# Altium PCB touch-24.PcbDoc
Units mm, origin at the board's own origin, x right, y up, seen from the top; angles counter-clockwise.
Board outline 151 x 86.38 mm, 2 copper layers (Top Layer, Bottom Layer); 53 components, 43 nets, 145 pads, 23 vias.
Unrouted connection lines stored in the file: 2.
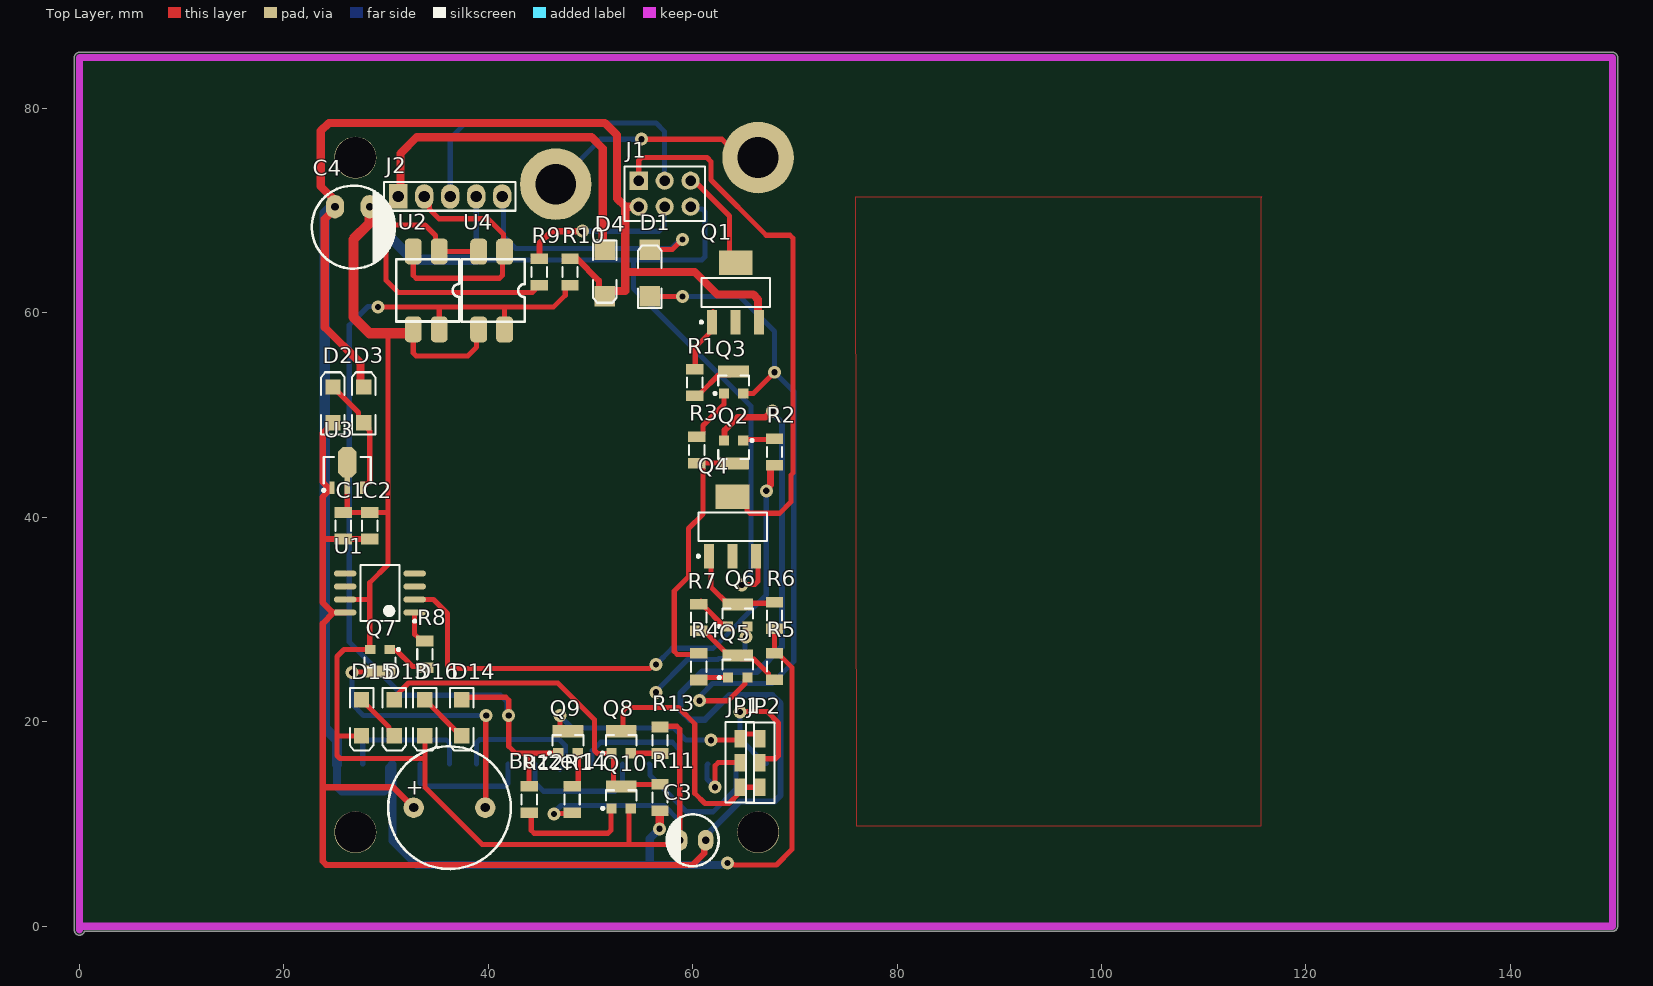
[diagram p0: Top Layer view]
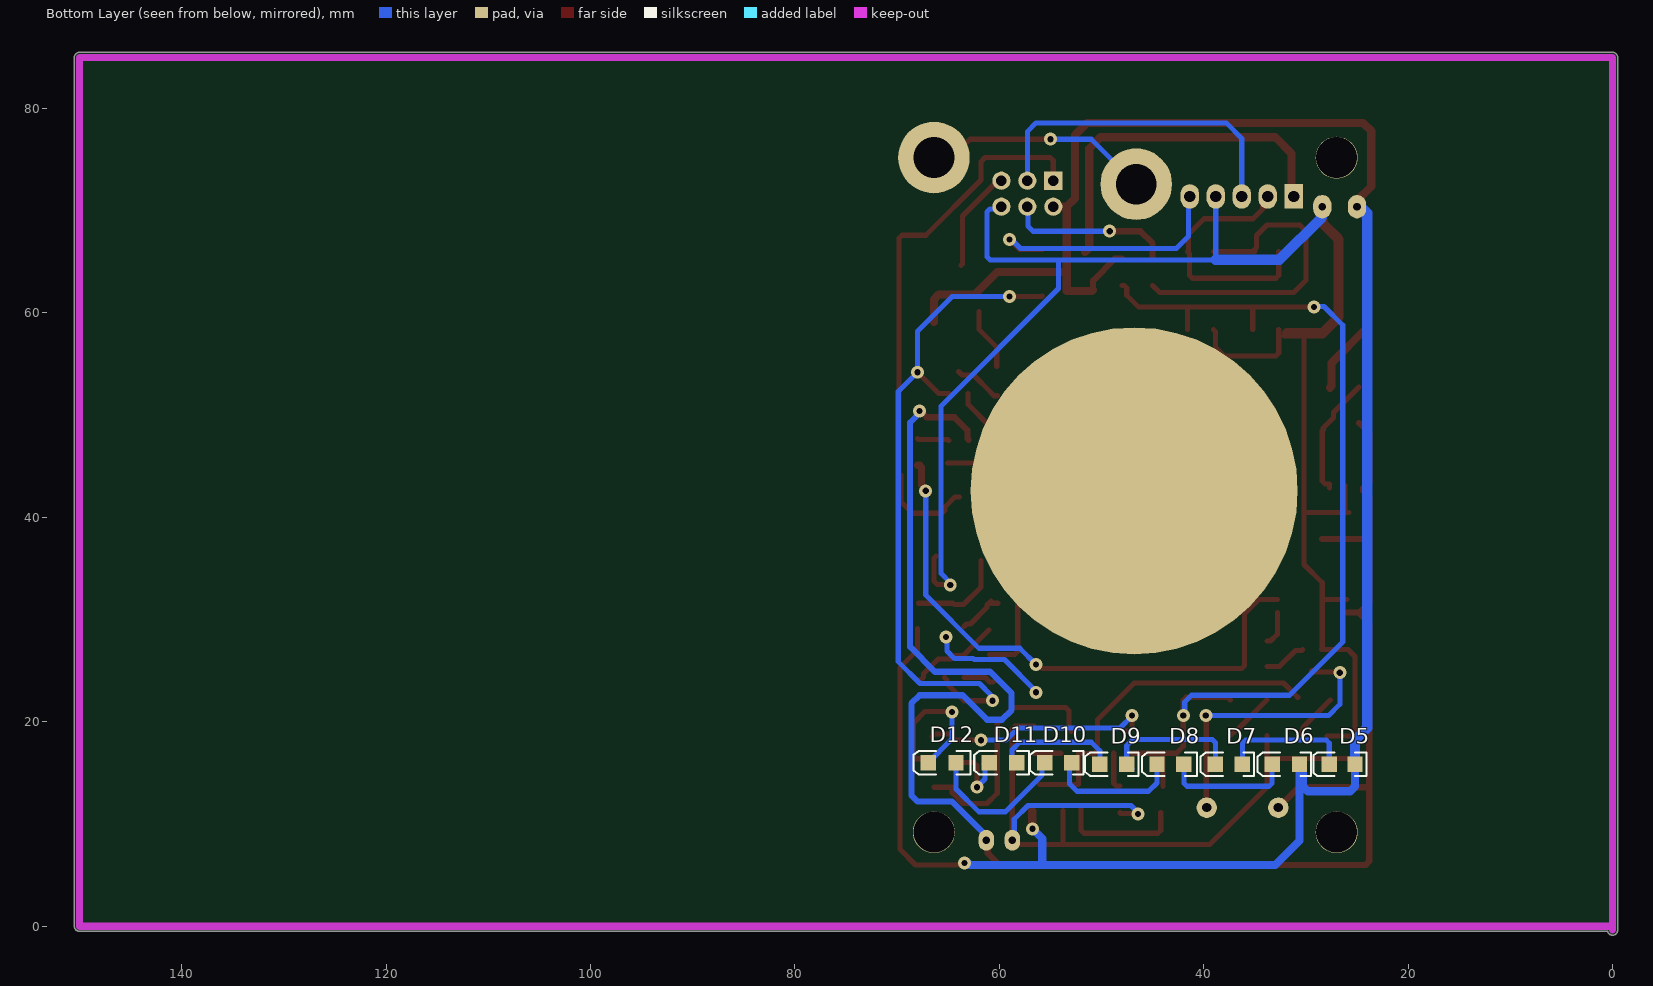
[diagram p1: Bottom Layer view, seen from below]

## Layer stack, top to bottom
Top Solder: solder mask 0.0102, Solder Resist, Dk 3.5
Top Layer: signal copper 0.0356
Dielectric 1: dielectric 0.32, FR-4, Dk 4.8
Bottom Layer: signal copper 0.0356
Bottom Solder: solder mask 0.0102, Solder Resist, Dk 3.5

## Board outline
-0.5,-0.381 -0.5,85 cw(c0,85) 0,85.5 150,85.5 cw(c150,85) 150.5,85 150.5,0 cw(c150,0) 150,-0.5 0.486,-0.5 cw(c0,-0.381)

## Design rules (kind name [scope] priority, off if disabled: settings)
Clearance Clearance_1 [InPolygon] p1: gap=1 ignorepadtopadclearanceinfootprint=FALSE
Clearance [All] p2: gap=0.6 ignorepadtopadclearanceinfootprint=FALSE
PolygonConnect [All] p1: connectstyle=Relief reliefconductorwidth=0.254 reliefentries=4 polygonreliefangle="90 Angle" airgapwidth=0.254
RoomDefinition touch-24 [InComponentClass('touch-24')] p1: confinementstyle=ConfineIn formatcopy=TRUE lockcomponents=FALSE outline 144.907,-4.953 247.904,-4.953 247.904,23.114 144.907,23.114
RoutingLayers [All] p1: top layer_v5=FALSE bottom layer_v5=TRUE
RoutingVias [All] p1: holewidth=0.711 width=2.5 viastyle="Through Hole" minholewidth=0.711 minwidth=1.27 maxholewidth=0.711 maxwidth=2
SolderMaskExpansion [All] p1: expansion=0.102 istentingtop=FALSE
Width [All] p1: maxlimit=3 minlimit=0.5 preferedwidth=1
29 further rules are at their usual default settings.

## Components (designator, comment, footprint, x,y, rotation, side; value= is the part's Value field where it differs from the comment)
Buzzer1 "Buzzer" BUZZER 36.2,11.6 r0 top
C1 "=Value" "CAP 1206" 25.8,39.2 r270 top
C2 "=Value" "CAP 1206" 28.4,39.2 r270 top
C3 "=Value" ELEC-CAP-RAD10-20 60,8.4 r0 top
C4 "=Value" ELEC-CAP-RAD15-30 26.8,68.4 r180 top
D1 "D Tunnel1" 3.2X1.6X1.1#1 55.8,63.4 r90 top
D2 "D Tunnel1" 3.2X1.6X1.1#2 24.8,51 r90 top
D3 "D Tunnel1" 3.2X1.6X1.1#2 27.8,51 r90 top
D4 "D Tunnel1" 3.2X1.6X1.1#3 51.4,64.2 r270 top
D5 "LED2" 3.2X1.6X1.1#4 26.198,15.853 r0 bottom
D6 "LED2" 3.2X1.6X1.1#5 31.525,15.853 r0 bottom
D7 "LED2" 3.2X1.6X1.1#6 37.113,15.853 r0 bottom
D8 "LED2" 3.2X1.6X1.1#6 42.828,15.853 r0 bottom
D9 "LED2" 3.2X1.6X1.1#6 48.416,15.853 r0 bottom
D10 "LED2" 3.2X1.6X1.1#6 53.8,16 r0 bottom
D11 "LED2" 3.2X1.6X1.1#7 59.25,16 r0 bottom
D12 "LED2" 3.2X1.6X1.1#7 65.2,16 r0 bottom
D13 "D Tunnel1" 3.2X1.6X1.1#2 30.8,20.4 r270 top
D14 "D Tunnel1" 3.2X1.6X1.1#2 37.4,20.4 r270 top
D15 "D Tunnel1" 3.2X1.6X1.1#2 27.6,20.4 r270 top
D16 "D Tunnel1" 3.2X1.6X1.1#2 33.8,20.4 r270 top
J1 "Header3X2" "HEADER 3X2" 54.72,72.94 r0 top
J2 "Header5X1" "HEADER 5X1" 31.2,71.4 r0 top
JP1 "Jumper Selector" "Jumper Selector"#1 64.6,13.52 r90 top
JP2 "Jumper Selector" "Jumper Selector"#2 66.6,13.46 r90 top
Q1 "MOSFET-P4" SOT223_N 64.2,62 r90 top
Q2 "PNP" SOT-23B_N 64,46.4 r270 top
Q3 "QNPN" SOT-23B_L#1 64,53.2 r90 top
Q4 "MOSFET-P4" SOT223_N 63.9,39.1 r90 top
Q5 "QNPN" SOT-23B_L#1 64.4,25.4 r90 top
Q6 "QNPN" SOT-23B_L#1 64.4,30.4 r90 top
Q7 "QNPN" SOT-23B_L#2 29.4,26 r270 top
Q8 "QNPN" SOT-23B_L#1 53,18 r90 top
Q9 "QNPN" SOT-23B_L#1 47.8,18 r90 top
Q10 "QNPN" SOT-23B_L#1 53,12.6 r90 top
R1 "10K" "RES 1206 (3216X08L)" 60.2,53.2 r90 top
R2 "10K" "RES 1206 (3216X08L)" 68,46.4 r90 top
R3 "10K" "RES 1206 (3216X08L)" 60.4,46.6 r90 top
R4 "10K" "RES 1206 (3216X08L)" 60.6,25.4 r270 top
R5 "10K" "RES 1206 (3216X08L)" 68,25.4 r90 top
R6 "10K" "RES 1206 (3216X08L)" 68,30.4 r90 top
R7 "10K" "RES 1206 (3216X08L)" 60.6,30.2 r90 top
R8 "10K" "RES 1206 (3216X08L)" 33.8,26.6 r270 top
R9 "10K" "RES 1206 (3216X08L)" 45,64 r270 top
R10 "10K" "RES 1206 (3216X08L)" 48,64 r90 top
R11 "10K" "RES 1206 (3216X08L)" 56.8,12.6 r270 top
R12 "10K" "RES 1206 (3216X08L)" 44,12.4 r270 top
R13 "10K" "RES 1206 (3216X08L)" 56.8,18.2 r270 top
R14 "10K" "RES 1206 (3216X08L)" 48.2,12.4 r90 top
U1 "ATtiny15L-1SC" 8S2_N 29.4,32.6 r180 top
U2 "PC817" DIP4 35.2,66.02 r270 top
U3 "LM1117MP-3.3" SOT89L 26.2,44.6 r90 top
U4 "PC817" DIP4 41.6,66 r270 top

## Footprints (in the part's own frame and the unit in brackets; to place one, negate y for a bottom-side part, rotate by r counter-clockwise, add the part's x,y. Pads: shape width x height; smd on the part's side, far side on the other; paste and mask are expansions set on the pad)
3.2X1.6X1.1#1 [mm] "SMT LED; 2 Flat Leads"
  rect 2x2 smd: 1(-1.75,0) 2(2.8,0)
  silkscreen extent -2.9,-1.15 3.2,1.15
3.2X1.6X1.1#2 [mm] "SMT LED; 2 Flat Leads"
  rect 1.5x1.5 smd: 1(-1.75,0) 2(1.75,0)
  silkscreen extent -2.9,-1.15 3.2,1.15
3.2X1.6X1.1#3 [mm] "SMT LED; 2 Flat Leads"
  rect 2x2 smd: 1(-2,0) 2(2.55,0)
  silkscreen extent -2.9,-1.15 3.2,1.15
3.2X1.6X1.1#4 [mm] "SMT LED; 2 Flat Leads"
  rect 1.5x1.5 smd: 1(-0.998,0) 2(1.524,0)
  silkscreen extent -2.14,-1.15 3.05,1.15
3.2X1.6X1.1#5 [mm] "SMT LED; 2 Flat Leads"
  rect 1.5x1.5 smd: 1(-0.889,0) 2(1.778,0)
  silkscreen extent -2.03,-1.15 3.2,1.15
3.2X1.6X1.1#6 [mm] "SMT LED; 2 Flat Leads"
  rect 1.5x1.5 smd: 1(-0.889,0) 2(1.75,0)
  silkscreen extent -2.03,-1.15 3.2,1.15
3.2X1.6X1.1#7 [mm] "SMT LED; 2 Flat Leads"
  rect 1.5x1.5 smd: 1(-0.97,0) 2(1.75,0)
  silkscreen extent -2.16,-1.15 3.2,1.15
8S2_N [mm] "SOP, 8-Leads, Body 5.3x5.3mm, Pitch 1.27mm, IPC Medium Density"
  oval 2.2x0.6 smd: 1(-3.4,1.905) 2(-3.4,0.635) 3(-3.4,-0.635) 4(-3.4,-1.905) 5(3.4,-1.905) 6(3.4,-0.635) 7(3.4,0.635) 8(3.4,1.905)
  silkscreen extent -3.52,-2.75 1.9,2.88, body extent -2.73,-2.75 2.73,2.75, height 2.16
BUZZER [mm] "BUZZER"
  round 2 hole 0.9: 1(-3.5,0) 2(3.5,0)
  silkscreen extent -6,-6 6,6
"CAP 1206" [mm]
  rect 1.05x1.7 smd: 1(-1.27,0) 2(1.326,0)
  silkscreen extent -0.47,-0.75 0.53,0.75, body extent -1.49,-0.77 1.55,0.75, height 0.75
DIP4 [mil]
  rrect50% 100x65 smd: 1(0,0) 2(0,-100) 3(300,-100) 4(300,0)
  silkscreen extent 30,-165 270,77, body extent -5,-140 305,40, height 169
ELEC-CAP-RAD10-20 [mil]
  oval 60x80 hole 30: 1(-50,0) 2(50,0)
  silkscreen extent -100,-100 100,100, body extent -124,-124 124,124, height 404
ELEC-CAP-RAD15-30 [mil]
  oval 70x90 hole 30: 1(-62.99,-78.74) 2(70.87,-78.74)
  silkscreen extent -160,-160 160,160, body extent -167,-167 167,167, height 609
"HEADER 3X2" [mil]
  rect 70x70 hole 40: 1(0,0)
  round 70 hole 40: 2(0,-100) 3(100,0) 4(100,-100) 5(200,0) 6(200,-100)
  silkscreen extent -55,-155 255,55, body extent -51,-150 249,50, height 330
"HEADER 5X1" [mm]
  rect 1.8x2.4 hole 1.1: 1(0,0)
  oval 1.8x2.4 hole 1.1: 2(2.54,0) 3(5.08,0) 4(7.62,0) 5(10.16,0)
  silkscreen extent -1.4,-1.4 11.46,1.4, body extent -1.22,-1.19 11.48,1.35, height 8.38
"Jumper Selector"#1 [mm]
  rect 1.7x1 smd: 1(2.48,0) 2(0.08,0) 3(4.83,0)
  silkscreen extent -1.4,-1.4 6.48,1.4, body extent -1.24,-1.27 6.38,1.27, height 10.16
"Jumper Selector"#2 [mm]
  rect 1.7x1 smd: 1(2.54,0) 2(0.14,0) 3(4.89,0)
  silkscreen extent -1.4,-1.4 6.48,1.4, body extent -1.24,-1.27 6.38,1.27, height 10.16
"RES 1206 (3216X08L)" [mm] "Chip Resistor, 2-Leads, Body 3.2x1.6mm, IPC High Density _ (0.125 W)"
  rect 1.05x1.7 smd: 1(-1.295,0) 2(1.301,0)
  silkscreen extent -0.5,-0.75 0.5,0.75, body extent -1.52,-0.76 1.53,0.76, height 0.6
SOT89L [mm] "SOT89, 3-Leads, Body 4.5x2.4 mm, Pitch 1.5mm, Lead Span 4.1mm, IPC High Density"
  rect 1.2x0.5 smd: 1(-1.7,1.5) 3(-1.7,-1.5)
  rect 1.6x0.5 smd: 2(-1.5,0)
  oct 3x1.8 smd: 2(0.8,0)
  silkscreen extent -2.07,-2.3 1.3,2.42, body extent -1.3,-2.3 1.3,2.3, height 1.6
SOT223_N [mm] "SOT223, 4-Leads, Body 6.5x3.5mm, Pitch 2.3mm, Lead Span 7mm, IPC Medium Density"
  rect 2.4x1 smd: 1(-2.9,2.3) 2(-2.9,0) 3(-2.9,-2.3)
  rect 2.4x3.3 smd: 4(2.9,0)
  silkscreen extent -3.02,-3.35 1.4,3.47, body extent -1.85,-3.35 1.85,3.35, height 1.7
SOT-23B_L#1 [mm] "SOT23, 3-Leads, Body 2.9x1.3mm, Pitch 0.95mm, Lead Span 2.4mm, IPC High Density"
  rect 1x1 smd: 1(-1.075,0.95) 2(-1.075,-0.95)
  rect 1.2x3 smd: 3(1.075,0)
  silkscreen extent -1.2,-1.5 0.7,1.92, body extent -0.7,-1.5 0.7,1.5, height 1.14
SOT-23B_L#2 [mm] "SOT23, 3-Leads, Body 2.9x1.3mm, Pitch 0.95mm, Lead Span 2.4mm, IPC High Density"
  rect 0.85x1 smd: 1(-1.075,0.95) 2(-1.075,-0.95)
  rect 1.2x3 smd: 3(1.075,0)
  silkscreen extent -1.2,-1.5 0.7,1.93, body extent -0.7,-1.5 0.7,1.5, height 1.14
SOT-23B_N [mm] "SOT23, 3-Leads, Body 2.9x1.3mm, Pitch 0.95mm, Lead Span 2.4mm, IPC Medium Density"
  rect 1x1 smd: 1(-1.125,0.95) 2(-1.125,-0.95)
  rect 1.2x3 smd: 3(1.125,0)
  silkscreen extent -1.25,-1.5 0.7,1.93, body extent -0.7,-1.5 0.7,1.5, height 1.14

## Part data
C1 C2: library part Capacitor, "Capacitor"
C3 C4: library part "Capacitor Electrolytic", "Electrolytic Capacitor"
D1 D2 D3 D4 D13 D14 D15 D16: "Tunnel Diode - RLC Model", LatestRevisionDate=17-Jul-2002, LatestRevisionNote="Re-released for DXP Platform.", PackageDescription="SM LED; 2 Flat Leads", PackageReference=3.2X1.6X1.1, PackageVersion=Feb-2002, Published=8-Jun-2000, Publisher="Altium Limited"
D5 D6 D7 D8 D9 D10 D11 D12: "Typical RED, GREEN, YELLOW, AMBER GaAs LED", LatestRevisionDate=17-Jul-2002, LatestRevisionNote="Re-released for DXP Platform.", PackageDescription="SM LED; 2 Flat Leads", PackageReference=3.2X1.6X1.1, PackageVersion=Feb-2002, Published=8-Jun-2000, Publisher="Altium Limited"
Q1 Q4: "P-Channel MOSFET, Externally Terminated Substrate", Code_IPC=SOT223-4, Code_JEDEC=TO-261-AA-B, Code_JEITA=SC-75, LatestRevisionDate=29-May-2009, LatestRevisionNote="IPC-7351 Footprint Added.", PackageDescription="4-Pin SOT-223 Package 2.3 mm Pitch, 7 mm Lead Span", PackageReference=SOT223, PackageVersion=2002, Published=24-Mar-1999, Publisher="Altium Limited"
Q2: "PNP Bipolar Transistor", LatestRevisionDate=29-May-2009, LatestRevisionNote="IPC-7351 Footprint Added.", PackageDescription="3-Pin SOT-23 Package 0.95 mm Pitch, 2.4 mm Lead Span", PackageReference=SOT-23B, PackageVersion=Aug-1999, Published=8-Jun-2000, Publisher="Altium Limited"
Q3 Q5 Q6 Q7 Q8 Q9 Q10: "NPN Bipolar Transistor", LatestRevisionDate=29-May-2009, LatestRevisionNote="IPC-7351 Footprint Added.", PackageDescription="3-Pin SOT-23 Package 0.95 mm Pitch, 2.4 mm Lead Span", PackageReference=SOT-23B, PackageVersion=Aug-1999, Published=8-Jun-2000, Publisher="Altium Limited"
R1 R2 R3 R4 R5 R6 R7 R8 R9 R10 R11 R12 R13 R14: library part Resistor, "Resistor", Power="1/4 W", Tolerance=5%
U1: "8-Bit AVR Microcontroller with 1K Byte of Flash Memory", Supplier Part Number 1=ATTINY15L-1SC-ND, ComponentLink1Description=Datasheet, ComponentLink1URL=http://www.atmel.com/dyn/resources/prod_documents/doc1187.pdf, ComponentLink2Description="Atmel.com Home", ComponentLink2URL=http://www.atmel.com, DatasheetVersion=1187E-AVR-06/02, LatestRevisionDate=16-Oct-2006, LatestRevisionNote="IPC-7351 Footprint Added.", PackageDescription="8-Lead, 0.208\" Body, Plastic Small Outline Package (EIAJ)", PackageReference=8S2, PackageVersion="revF, Apr-2008", Published=17-Sep-2003, Publisher="Altium Limited", Supplier 1=Digi-Key, Supplier 2=Mouser, Supplier Part Number 2=556-ATTINY15L1SC
U2 U4: library part OPTCOUPLER_01, "4-Pin Phototransistor Optocoupler"
U3: "800mA Low-Dropout Linear Regulator", DigiKeyPartNumber=LM1117MP-3.3CT-ND, Manufacturer="National Semiconductor", PackageTopMarking=XYTT*N05A, PowerWise=N, Code_IPC=SOT223-4, Code_JEDEC=TO-261-AA, ComponentLink1Description="LM1117 Datasheet", ComponentLink1URL=http://www.national.com/ds/LM/LM1117.pdf, ComponentLink2Description="LM1117 Web Page", ComponentLink2URL=http://www.national.com/pf/LM/LM1117.html, ComponentLink3Description="MP04A Package Page", ComponentLink3URL=http://www.national.com/packaging/folders/mp04a.html, CompType="LDO IC", DatasheetVersion=Apr-2006, PackageDescription="Molded SOT-223, 6.50 x 3.56 x 1.6mm Body, 4 Lead, 2.3mm Pitch", PackageReference=MP04A, PackageVersion="revB, Apr-2003", PartNumber=LM1117MP-3.3, PinCount=4, Published=4-Dec-2008, Publisher="Altium Limited", RoHS=O
Buzzer1: ComponentLinkURL=www.picpars.com, Designer="Seyed Mohsen Ghasemain"

## Free pads (board coordinates)
  round 4.1 hole 4: 2(66.4,9.2) 3(27,9.2) 4(27,75.2)
  round 7 hole 4: 5(46.6,72.6) 5(66.4,75.2)
  round 32 smd far side: 6(46.8,42.6)

## Via types
v1: diameter 1.27, hole 0.6, Top Layer to Bottom Layer, 23 vias

## Nets (pads, with @x,y where several pads share a name; then routed paths per layer and width w, separated by ;. In a path a pad name is that pad's centre, name@x,y a point inside that pad or via, vN(x,y) a via of type N, cw(c..) or ccw(c..) an arc to the next point about the centre after c; other vN are vias at no path point)
ACS: D1.2 J2.5 | length 25.9
  Top Layer w0.5: D1.2 58,66.2 v1(59,67.2)
  Bottom Layer w0.5: J2.5 41.497,71.263 41.497,67.503 42.685,66.315 57.926,66.315 58.811,67.2 v1(59,67.2)
bizer: R8.1 U1.1 | length 3.4
  Top Layer w0.5: U1.1 32.8,28.57 33.475,27.895 R8.1
GND: C1.1 C2.1 C3.1 C4.1 D15.2 D16.2 J1.6 J2.4 Q4.3 Q6.2 Q7.2 Q10.2 R13.1 R14.1 U1.7 U2.3 U3.2 U4.3 | length 263.2
  Top Layer w0.5: C1.1 C1.1@26.2,40.47 ; U1.7 28.4,31.965 ; U3.2@26.2,43.1 C1.1@26.2,40.47 ; D15.2@27.941,18.6 25.2,18.6 ; C2.1@27.965,40.47 C1.1@26.2,40.47 ; C2.1@28,40.47 C2.1 30.2,40.47 ; Q7.2 Q7.2@28.4,27.075 ; U2.3@32.142,57.742 30.2,57.742 30.2,40.47 ; U2.3 32.66,56.093 32.953,55.8 38,55.8 38.863,56.663 38.863,58.183 U4.3 ; D16.2 33.8,16.4 ; v1(46.429,10.976) 46.493,11.04 48.136,11.04 R14.1 ; Q10.2@53.75,11.325 53.75,8 ; R13.1@56.6,19.561 58.437,19.561 58.73,19.269 C3.1 58.33,8 53.75,8 ; v1(64.8,33.4) 64.852,33.452 66.107,33.452 66.4,33.744 66.4,36 Q4.3 ; 25.2,18.6 25.2,16.693 25.493,16.4 33.8,16.4 ; 25.2,18.6 25.2,26.4 25.875,27.075 Q7.2@28.4,27.075 ; Q7.2@28.4,27.075 28.4,31.965 ; 28.4,31.965 28.4,33.6 30.2,35.4 30.2,40.47 ; 33.8,16.4 33.8,13.6 39.4,8 53.75,8
  Top Layer w1: C4.1@28.4,71 28.384,70.984 28.384,68.784 26.8,67.2 26.8,59.6 28.376,58.024 30.2,58.024 U2.3@31.86,58.024
  Bottom Layer w0.5: J2.4 38.82,65.2 54.2,65.2 ; v1(46.429,10.976) 46.429,11.122 47.107,11.8 57.2,11.8 58.534,10.466 58.534,8.596 C3.1 ; v1(56.4,22.885) 56.4,23 59.5,26.1 62.456,26.1 62.556,26.2 64.4,26.2 65.125,26.925 65.125,28.225 v1(65.21,28.31) ; J1.6@60.2,70.46 60.2,70.38 60.39,70.189 60.907,70.189 61.2,69.896 61.2,65.493 60.907,65.2 54.2,65.2 ; v1(64.8,33.4) 64.8,33.608 65.715,34.523 65.715,50.885 54.2,62.4 54.2,65.2
  Bottom Layer w1: C4.1@28.4,71 28.416,70.984 28.416,69.384 32.6,65.2 38.82,65.2
key: J1.3 J2.3 | length 32.4
  Bottom Layer w0.5: J2.3 36.28,77.08 37.8,78.6 56.4,78.6 57.26,77.74 J1.3
key+: J1.5 Q1.4 | length 9.7
  Top Layer w0.5: J1.5@60.177,72.9 63.6,69.477 63.6,64.8 Q1.4@63.737,64.663
key-: J1.1 Q4.4 | length 54.4
  Top Layer w0.5: J1.1 54.72,74.907 55.013,75.2 61.4,75.2 61.8,74.8 61.8,73 67.2,67.6 69.507,67.6 69.8,67.307 69.8,44.328 69.6,44.128 69.6,41.493 68.507,40.4 65.593,40.4 65.3,40.693 65.3,41.05 64.35,42 Q4.4
led: D14.1 Q9.1 R10.1 R12.1 U2.4 U4.4 | length 96.2
  Top Layer w0.5: v1(29.2,60.6) 29.201,60.599 35.2,60.599 ; U2.4 35.2,60.599 ; D14.1 37.65,22.4 41.707,22.4 42,22.107 v1(42,20.6) 42,17.6 42.675,16.925 44,16.925 ; U4.4 41.6,60.599 ; R12.1 44,16.925 ; Q9.1@47.03,16.925 44,16.925 ; R10.1 47.809,62.705 47.534,62.43 47.534,61.734 46.399,60.599 41.6,60.599 ; 35.2,60.599 41.6,60.599
  Bottom Layer w0.5: v1(29.2,60.6) 29.179,60.621 28.221,60.621 26.4,58.8 26.4,27.8 31.6,22.6 41.2,22.6 41.853,21.947 41.853,20.747 v1(42,20.6)
"led IN": J2.2 U2.2 U4.1 | length 25.1
  Top Layer w0.5: U2.2 32.66,63.693 32.953,63.4 41.107,63.4 41.4,63.693 41.4,65.8 U4.1 41.473,66.127 41.473,67.727 39.98,69.22 35.18,69.22 34.249,70.151 34.249,71.151 J2.2@34,71.4
NetBuzzer1_2: Buzzer1.2 Q7.3 | length 28.4
  Top Layer w0.5: v1(26.685,24.8) 26.747,24.863 29.35,24.863 29.45,24.963 Q7.3@29.45,25 ; Buzzer1.2@39.8,11.8 39.75,11.85 39.75,20.55 v1(39.8,20.6)
  Bottom Layer w0.5: v1(26.685,24.8) 26.685,21.715 27.8,20.6 v1(39.8,20.6)
NetD1_1: D1.1 Q3.2 Q5.2 | length 67.5
  Top Layer w0.5: D1.1 55.85,61.6 v1(59,61.6) ; v1(60.661,22.061) 63.461,22.061 65.1,23.7 65.1,24.075 Q5.2 ; Q3.2 65.925,52.125 v1(68,54.2)
  Bottom Layer w0.5: v1(59,61.6) 64.6,61.6 68,58.2 v1(68,54.2) 69.885,52.315 69.885,25.885 67.75,23.75 61.95,23.75 60.808,22.608 60.808,22.208 v1(60.661,22.061)
NetD2_2: D2.2 D3.1 U3.3 | length 12
  Top Layer w0.5: D2.2 27.3,50.25 27.3,49.75 D3.1 ; U3.3 27.7,43.25 28.107,43.25 28.4,43.543 28.4,48.45 28.3,48.55 28.3,48.75 D3.1@27.7,49.35
NetD4_1: D4.1 J2.1 | length 35.4
  Top Layer w0.8: J2.1@31.4,71.409 31.4,75.6 33,77.2 50.1,77.2 51.2,76.1 51.2,66.35 D4.1@51.6,65.95
NetD5_2: D5.2 D7.1 | length 12.9
  Bottom Layer w0.5: D5.2 27.722,17.907 28.015,18.2 35.931,18.2 36.224,17.907 D7.1
NetD6_2: D6.2 D8.1 | length 12.6
  Bottom Layer w0.5: D6.2 33.303,13.99 33.596,13.697 41.646,13.697 41.939,13.99 D8.1
NetD7_2: D7.2 D9.1 | length 13.7
  Bottom Layer w0.5: D7.2 38.863,17.97 39.156,18.263 46.937,18.263 47.527,17.673 D9.1 D9.1@47.027,15.353
NetD8_2: D8.2 D10.1 | length 12.9
  Bottom Layer w0.5: D8.2 44.578,14.022 45.4,13.2 52.4,13.2 53.115,13.915 D10.1@53.115,15.853
NetD9_2: D9.2 D11.1 | length 11.9
  Bottom Layer w0.5: D9.2 50.166,17.166 51,18 58,18 58.749,17.251 D11.1@58.749,15.853
NetD10_2: D10.2 D12.1 | length 14.5
  Bottom Layer w0.5: D10.2@55.754,15.853 55.807,15.8 55.807,14.793 59.4,11.2 62,11.2 64.23,13.43 D12.1
NetD11_2: D11.2 JP1.1 | length 7.2
  Top Layer w0.5: v1(62.2,13.6) 62.2,15.707 62.493,16 JP1.1
  Bottom Layer w0.5: D11.2@61.469,15.853 61.4,15.784 61.4,14.4 v1(62.2,13.6)
NetD12_2: D12.2 JP2.1 | length 15.6
  Top Layer w0.5: v1(64.645,20.949) 64.696,21 67.288,21 68.4,19.888 68.4,16.674 68.107,16.382 JP2.1@66.6,16.382
  Bottom Layer w0.5: v1(64.645,20.949) 64.645,18.305 67.032,15.918 D12.2@67.2,15.918
NetD13_1: D13.1 Q8.1 Q10.3 R11.1 | length 33.5
  Top Layer w0.5: D13.1@30.8,22.4 32.2,23.8 46.8,23.8 50.4,20.2 50.4,17.203 50.693,16.91 52.251,16.91 52.251,13.846 R11.1@56.061,13.846
NetD13_2: D13.2 D15.1 | length 4.8
  Top Layer w0.5: D15.1 30.3,19.45 30.3,19.15 D13.2
NetD14_2: D14.2 D16.1 | length 5
  Top Layer w0.5: D16.1 36.8,19.15 36.9,19.15 D14.2
NetJ1_4: J1.4 R9.1 | length 16.1
  Top Layer w0.6: R9.1 45,66.8 46.2,68 v1(49.2,68)
  Bottom Layer w0.5: v1(49.2,68) 56.707,68 57.2,68.493 J1.4@57.2,70.218
NetJP1_2: JP1.2 JP2.2 Q8.3 | length 24.1
  Top Layer w0.5: Q8.3 53,19.225 53.2,19.425 53.2,21.107 53.493,21.4 58.6,21.4 60.2,19.8 60.2,13 61.2,12 63.55,12 64.6,13.05 JP1.2@64.6,13.4 ; JP1.2 JP2.2@66.4,13.6
NetJP1_3: JP1.3 JP2.3 Q9.3 | length 23.5
  Top Layer w0.5: v1(47,20.6) 47,19.425 47.35,19.075 Q9.3 ; v1(61.8,18.2) 64.35,18.2 64.6,18.45 JP1.3@64.6,18.95 ; JP1.3@64.6,18.6 64.8,18.8 66.35,18.8 66.6,18.55 JP2.3@66.6,18.54
  Bottom Layer w0.5: v1(47,20.6) 48.2,19.4 58.156,19.4 59.356,18.2 v1(61.8,18.2)
NetQ1_1: Q1.1 R1.2 | length 6.1
  Top Layer w0.5: R1.2@60.252,54.746 60.252,56.652 62,58.4 Q1.1@62,60.115
NetQ2_1: Q2.3 R3.1 R4.1 | length 27.5
  Top Layer w0.5: R4.1@60.946,26.6 58.493,26.6 58.2,26.893 58.2,32.8 59.6,34.2 59.6,38.915 61,40.315 61,45.03 60.725,45.305 R3.1 Q2.3@65.069,45.305
NetQ2_2: Q2.1 R2.2 | length 3.1
  Top Layer w0.5: Q2.1 65.038,47.613 67.912,47.613 R2.2
NetQ3_1: Q3.3 R1.1 | length 4.8
  Top Layer w0.5: R1.1 60.525,51.905 60.8,52.18 60.8,52.2 62.525,53.925 63.65,53.925 Q3.3
NetQ3_2: Q3.1 R3.2 | length 5
  Top Layer w0.5: R3.2@60.858,48.033 61,48.176 61,49 63.05,51.05 Q3.1
NetQ4_1: Q4.1 Q6.3 R6.2 | length 9.5
  Top Layer w0.5: Q4.1@61.8,35.771 61.8,33.175 63.5,31.475 Q6.3 64.525,31.6 R6.2@67.9,31.6
NetQ5_1: Q5.3 R5.1 R7.1 | length 9.2
  Top Layer w0.5: R7.1@61,29 63.15,26.85 63.15,26.825 63.5,26.475 Q5.3 64.75,26.125 65.999,26.125 67.4,24.724 67.4,24.38 67.675,24.105 R5.1
NetQ5_2: Q5.1 R4.2 | length 3.1
  Top Layer w0.5: R4.2@60.2,24.099 R4.2@60.26,24.039 ; R4.2@60.6,23.899 60.925,23.899 61.351,24.325 Q5.1
NetQ6_2: Q6.1 R7.2 | length 4.5
  Top Layer w0.5: R7.2@60.125,31.597 R7.2@60.829,31.597 ; R7.2@60.829,31.797 61.2,31.426 61.2,31.2 62.825,29.575 63.2,29.575 Q6.1
NetQ7_2: Q7.1 R8.2 | length 4.2
  Top Layer w0.5: Q7.1 30.35,27.02 30.4,26.97 31.03,26.97 32.6,25.4 R8.2@33.8,25.4
NetQ8_3: Q8.2 R13.2 | length 2.7
  Top Layer w0.5: Q8.2 R13.2@56.6,16.925
NetQ9_3: Q9.2 R14.2 | length 3.7
  Top Layer w0.5: R14.2 48.525,13.701 48.8,13.976 Q9.2@48.8,16.919
NetQ10_2: Q10.1 R12.2 | length 11.9
  Top Layer w0.5: R12.2@44.2,11.125 44.2,9.393 44.493,9.1 51.707,9.1 52,9.393 Q10.1@52,11.529
NetR9_2: R9.2 U2.1 U4.2 | length 31.9
  Top Layer w0.5: U2.1@35,66 U4.2 ; U2.1 34.833,66.387 34.833,67.567 33.8,68.6 30.6,68.6 30,68 30,63.2 31.2,62 44.301,62 R9.2
out: R2.1 U1.2 | length 56.3
  Top Layer w0.5: U1.2 34.635,31.965 36,30.6 36,25.493 36.293,25.2 55.792,25.2 56.192,25.6 v1(56.4,25.6)
  Top Layer w0.7: v1(67.2,42.6) 67.2,42.754 67.6,43.154 67.6,44.93 67.775,45.105 R2.1
  Bottom Layer w0.5: v1(56.4,25.6) 58,27.2 62,27.2 67.2,32.4 v1(67.2,42.6)
vcc: Buzzer1.1 C1.2 C2.2 C3.2 D2.1 Q2.2 U1.8 U3.1 | length 172.4
  Top Layer w0.6: 24.703,30.765 23.8,31.668 23.8,37.951 ; 24.788,30.695 U1.8 ; D2.1 23.8,48.25 23.8,43.45 24.401,42.849 24.401,42.6 23.8,41.999 23.8,37.951 ; 24.847,30.647 23.8,29.6 23.8,13.6 ; C1.2@25.6,37.874 24,37.874 23.923,37.951 23.8,37.951 ; C1.2 C2.2 ; Buzzer1.1 30.7,13.6 23.8,13.6 ; C3.2 61.133,8.263 61.133,7.133 60,6 24.151,6 23.8,6.351 23.8,13.6 ; Q2.2@63,47.6 63.124,47.724 63.124,48.524 64.4,49.8 67.114,49.8 67.714,50.4 v1(67.8,50.4)
  Bottom Layer w0.6: C3.2 61.27,8.844 64.626,12.2 68,12.2 68.6,12.8 68.6,21.8 67.8,22.6 63.6,22.6 61.2,20.2 59.751,20.2 58.8,21.151 58.8,22.8 60.9,24.9 66.3,24.9 68.735,27.335 68.735,49.284 67.8,50.219 v1(67.8,50.4)
vdd: C4.2 D3.2 D4.2 D5.1 D6.1 J1.2 Q1.3 R5.2 R6.1 R10.2 R11.2 | length 240.1
  Top Layer w0.5: v1(63.4,6.2) 63.547,6.053 64.025,6.053 64.078,6 68.2,6 69.7,7.5 69.7,25.326 68.325,26.701 R5.2 R6.1
  Top Layer w0.6: R10.2 48.699,65.301 50.826,63.174 D4.2@50.826,62.25
  Top Layer w0.8: C4.2 25,70.188 24,69.188 24,58.6 27.5,55.1 27.5,52.85 D3.2@27.659,52.691 ; C4.2@25,70.788 25,71 23.6,72.4 23.6,77.8 24.4,78.6 51.4,78.6 52.6,77.4 52.6,71.2 53.4,70.4 ; D4.2@50.826,62.25 50.936,62.14 53.4,62.14 53.4,64 ; J1.2 53.4,70.4 ; v1(56.77,9.534) 56.785,9.549 56.785,11.284 R11.2 ; Q1.3@66.4,59.113 66.4,60.334 66.4,61.331 65.931,61.8 62.4,61.8 60.2,64 53.4,64 ; 53.4,64 53.4,70.4
  Bottom Layer w0.8: D5.1 25.2,13.669 25.669,13.2 29.817,13.2 30.286,13.669 30.286,15.503 D6.1 30.636,8.364 33,6 55.8,6 ; v1(56.77,9.534) 55.8,8.564 55.8,6 ; v1(63.4,6.2) 63.31,6.11 62.978,6.11 62.868,6 55.8,6
  Bottom Layer w1: C4.2@25,71 25,70.771 24,69.771 24,19.4 25.2,18.2 D5.1
pads on no net: Q1.2 Q4.2 U1.3 U1.4 U1.5 U1.6
copper on no net: | length 22.4
  Top Layer w0.5: v1(55,77) 62.857,77 64.657,75.2 66.4,75.2
  Bottom Layer w0.5: 46.6,72.6 51,77 v1(55,77)

## Polygon pours and split planes (outlines as drawn)
GND on Top Layer "NONET_L01_P024" (hatched 90Degree grid 0.5 track 0.2, shelved, pour order 24): 75.946,71.374 115.697,71.374 115.57,71.247 115.57,9.779 76.073,9.779

## Keep-outs
Keep-Out Layer:
  lines w0.7: 0,-0.381 0,85 150,85 150,0 0,0

## Silkscreen, mask and mechanical layers (free items; w line width, h text height)
Bottom Solder:
  lines w0.2: 22.914,5.185 70.539,5.185 70.539,79.353 22.914,79.353 22.914,5.185
Drill Guide:
  lines w0.2: 73.2,20.2 73.2,63.6 116,63.6 116,20.2 73.2,20.2

## Text inside footprints (layer, text, board x,y; h text height)
Buzzer1: Top Overlay "+" at 31.939,12.87 h1.52